# EAGLE board utility_v2 (EAGLE 8.7.1)
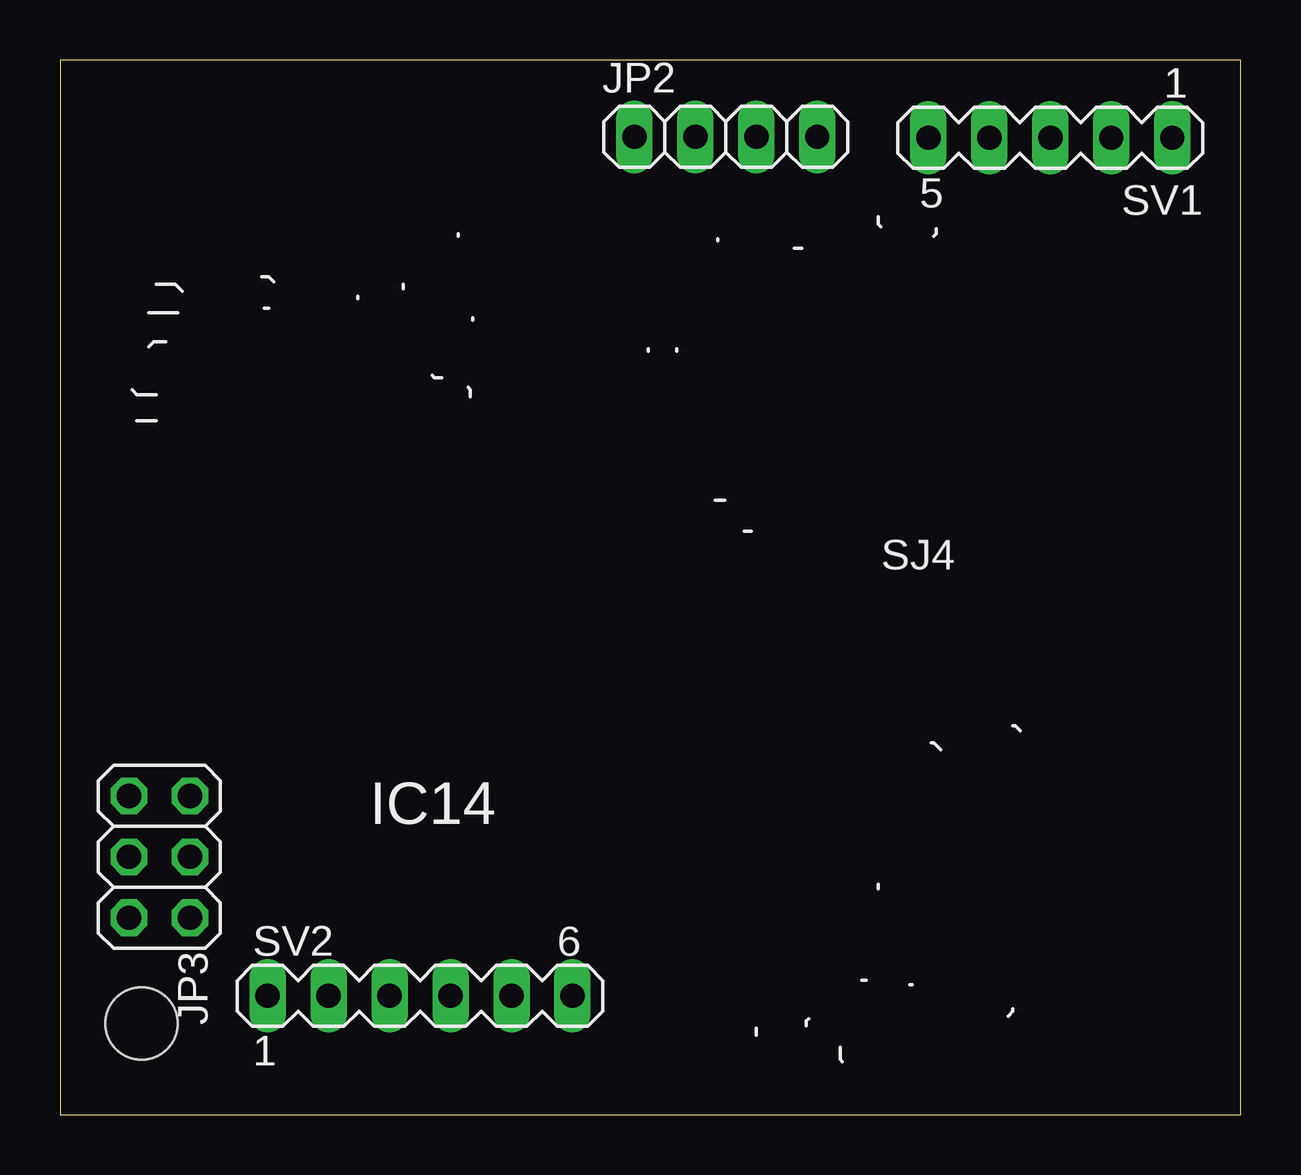
[diagram p0: board, top side]

Size 49.19 x 43.94 mm. Coordinates in mm from the lower left corner, seen from the top.
Outline: 0,0 49.19,0 49.19,43.94 0,43.94 0,0
Copper layers (1+2*15+16): Top 0.018mm / dielectric 0.25mm / Route2 0.035mm / dielectric 1mm / Route15 0.035mm / dielectric 0.25mm / Bottom 0.018mm
Design rules "pban_5mil-l4": minimum track width 5mil, minimum drill 0.3mm, track to track 5mil, track to pad 0.229mm, pad to pad 5mil, via to via 5mil, smd to smd 5mil, copper to edge 0.5mm, drill to drill 0.5mm, minimum pad ring 0.15mm, minimum via ring 0.15mm, stop-mask expansion 4mil, vias tented up to drill 0.35mm, thermal gap 10mil
Holes 3 mm at 3.4,3.8

## Footprints (pad centres in the part's own frame; a part is rotated, then mirrored left to right if it is on the bottom)
1X04 = drill 1.016 long: 1 -3.81,0; 2 -1.27,0; 3 1.27,0; 4 3.81,0
2X03 = drill 1.016 octagon: 1 -2.54,-1.27; 2 -2.54,1.27; 3 0,-1.27; 4 0,1.27; 5 2.54,-1.27; 6 2.54,1.27
MA05-1 = drill 1.016 long: 1 -5.08,0; 2 -2.54,0; 3 0,0; 4 2.54,0; 5 5.08,0
MA06-1 = drill 1.016 long: 1 -6.35,0; 2 -3.81,0; 3 -1.27,0; 4 1.27,0; 5 3.81,0; 6 6.35,0

## Placement (x,y rotation side)
JP2  [1X04]  27.74,40.74 0 top
JP3  [2X03]  4.14,10.74 90 top
SV1  [MA05-1]  41.26,40.7 180 top
SV2  [MA06-1]  15,4.95 0 top

## Library data of the parts
JP2 JP3 = pinhead
SV1 SV2 = con-lstb; OC_FARNELL: unknown; OC_NEWARK: unknown

## Nets
AGND: SV1.3
DENKYOKU1: SV1.4
DENKYOKU2: SV1.2
I1: SV1.5
I2: SV1.1

## Tracks (layer width: path | path; a pad name or v marks a point on that pad's centre or on a via)
AGND
  Top 0.508: 41.23,40.67 SV1.3
I1
  Top 0.508: 35.87,40.39 SV1.5

## Text on the board
bOrigins: SJ1 | SJ2 | SJ5
tNames: SJ4 | IC14
bNames: IC10 | VR1 | IC9 | D4 | D3 | D2 | D1
bValues: VR1